# Altium PCB op-pcb-mcp23017-pcb.PcbDoc
Units mil, origin at the board's own origin, x right, y up, seen from the top; angles counter-clockwise.
Board outline 1730 x 2925 mil, 2 copper layers (Top Layer, Bottom Layer); 4 components, 16 nets, 48 pads, 0 vias.
Unrouted connection lines stored in the file: 20.
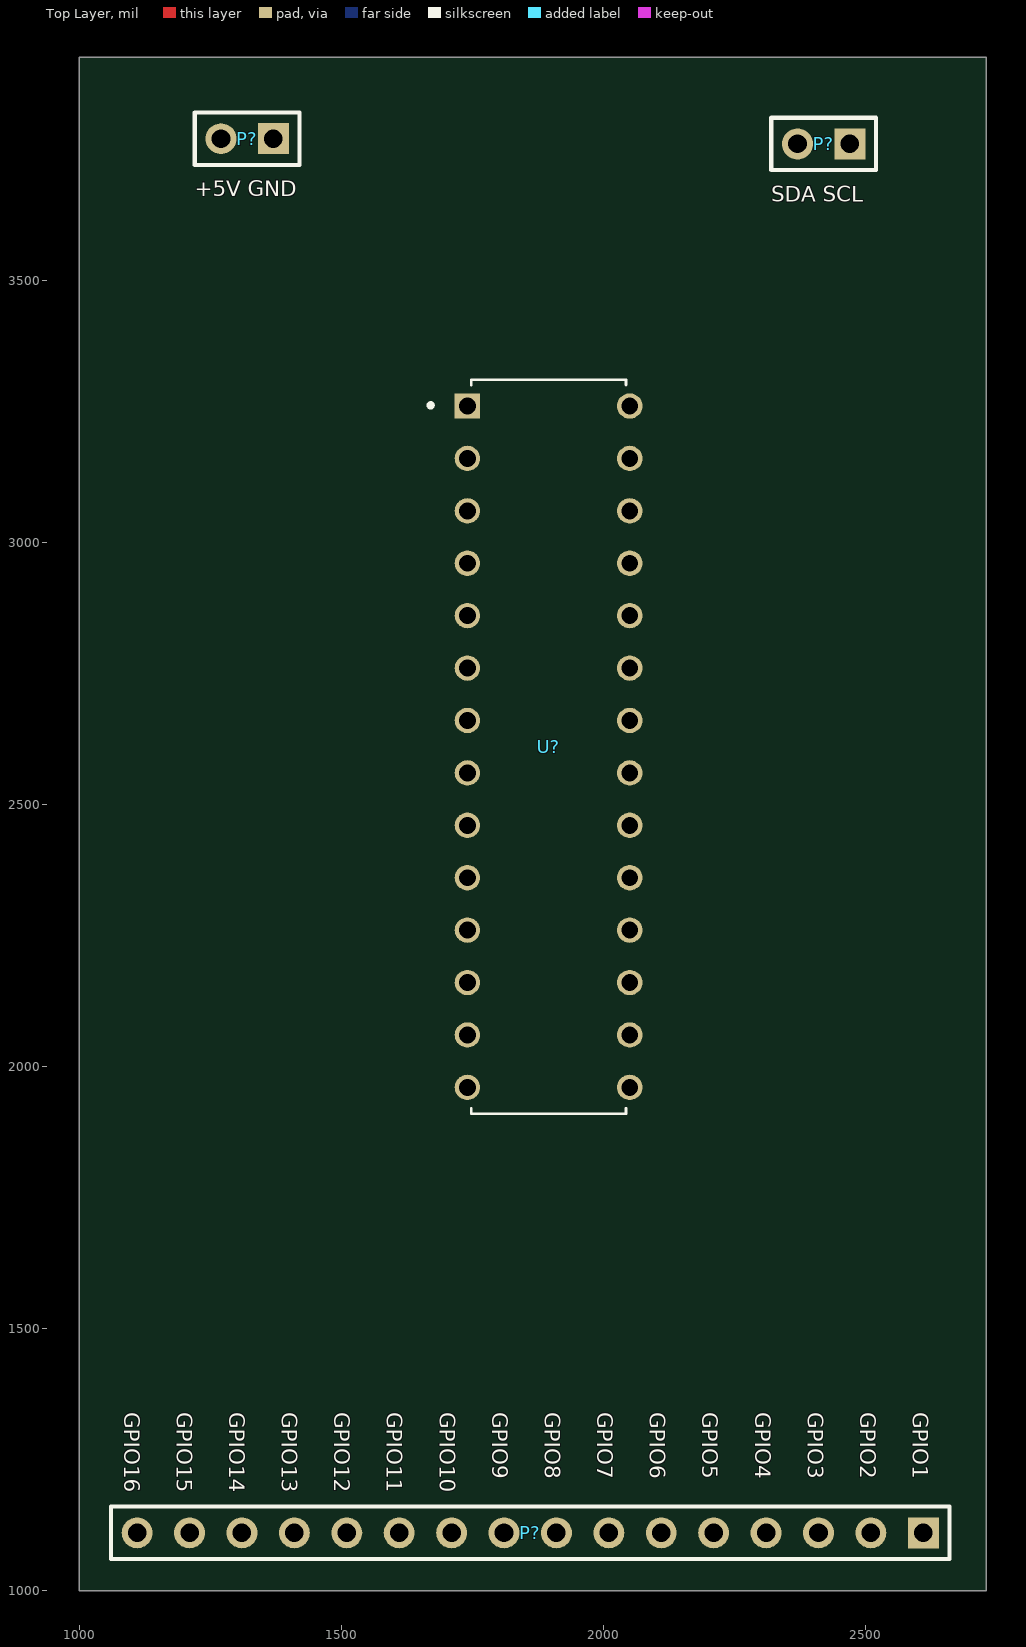
[diagram p0: Top Layer view]
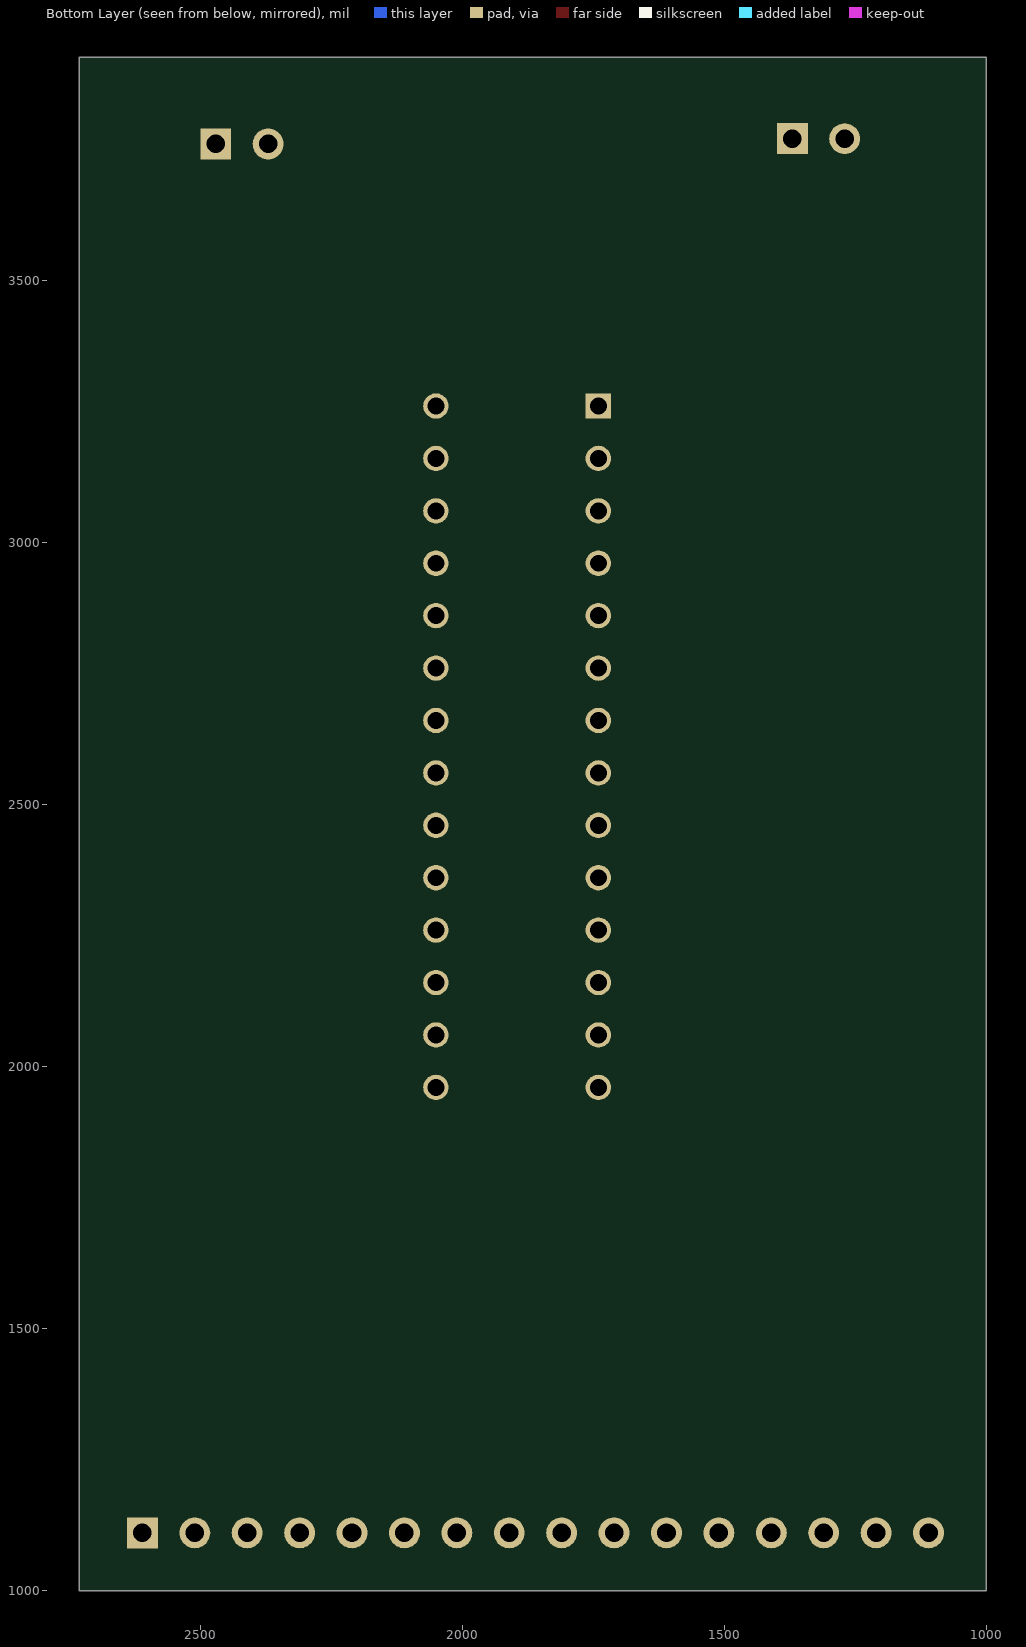
[diagram p1: Bottom Layer view, seen from below]

## Layer stack, top to bottom
Top Solder: solder mask 0.4, Solder Resist, Dk 3.5
Top Layer: signal copper 1.4
Dielectric 1: dielectric 12.6, FR-4, Dk 4.8
Bottom Layer: signal copper 1.4
Bottom Solder: solder mask 0.4, Solder Resist, Dk 3.5

## Board outline
1000,1000 2730,1000 2730,3925 1000,3925

## Design rules (kind name [scope] priority, off if disabled: settings)
Clearance [All] p1: gap=10 ignorepadtopadclearanceinfootprint=FALSE except(0: Arc-Hole Track-Hole SMDPad-Hole THPad-Hole Via-Hole Fill-Hole Poly-Hole Region-Hole Text-Hole)
PolygonConnect [All] p1: connectstyle=Relief reliefconductorwidth=10 reliefentries=4 polygonreliefangle="90 Angle" airgapwidth=10
RoutingVias [All] p1: holewidth=28 width=50 viastyle="Through Hole" minholewidth=28 minwidth=50 maxholewidth=28 maxwidth=50
SolderMaskExpansion [All] p1: expansion=4 istentingtop=FALSE
Width [All] p1: maxlimit=10 minlimit=10 preferedwidth=10
30 further rules are at their usual default settings.

## Classes and differential pairs
component class op-pcb-mcp23017-sch: P? U?

## Components (designator, comment, footprint, x,y, rotation, side; value= is the part's Value field where it differs from the comment)
P? "Header 2" HDR1X2 1370,3770 r180 top
P? "Header 2" HDR1X2 2470,3760 r180 top
P? "Header 16" HDR1X16 2610,1110 r180 top
U? "MCP23017" MCP23017 1895,2610 r0 top

## Footprints (in the part's own frame and the unit in brackets; to place one, negate y for a bottom-side part, rotate by r counter-clockwise, add the part's x,y. Pads: shape width x height; smd on the part's side, far side on the other; paste and mask are expansions set on the pad)
HDR1X2 [mm] "Connector; Header; 2 Position"
  rect 1.5x1.5 hole 0.9: 1(0,0)
  round 1.5 hole 0.9: 2(2.54,0)
  silkscreen extent -1.27,-1.27 3.81,1.27
HDR1X16 [mm] "Connector; Header; 16 Position"
  rect 1.5x1.5 hole 0.9: 1(0,0)
  round 1.5 hole 0.9: 2(2.54,0) 3(5.08,0) 4(7.62,0) 5(10.16,0) 6(12.7,0) 7(15.24,0) 8(17.78,0) 9(20.32,0) 10(22.86,0) 11(25.4,0) 12(27.94,0) 13(30.48,0) 14(33.02,0) 15(35.56,0) 16(38.1,0)
  silkscreen extent -1.27,-1.27 39.37,1.27
MCP23017 [mm]
  rect 1.23x1.23 / inner round 1.23 / far side rect 1.23x1.23 hole 0.82: 1(-3.935,16.51)
  round 1.23 hole 0.82: 2(-3.935,13.97) 3(-3.935,11.43) 4(-3.935,8.89) 5(-3.935,6.35) 6(-3.935,3.81) 7(-3.935,1.27) 8(-3.935,-1.27) 9(-3.935,-3.81) 10(-3.935,-6.35) 11(-3.935,-8.89) 12(-3.935,-11.43) 13(-3.935,-13.97) 14(-3.935,-16.51) 15(3.935,-16.51) 16(3.935,-13.97) 17(3.935,-11.43) 18(3.935,-8.89) 19(3.935,-6.35) 20(3.935,-3.81) 21(3.935,-1.27) 22(3.935,1.27) 23(3.935,3.81) 24(3.935,6.35) 25(3.935,8.89) 26(3.935,11.43) 27(3.935,13.97) 28(3.935,16.51)
  silkscreen extent -5.81,-17.78 3.75,17.78, body extent -4.06,-17.34 4.06,17.34, height 5.08

## Part data
P? P?: "Header, 2-Pin", LatestRevisionDate=17-Jul-2002, LatestRevisionNote="Re-released for DXP Platform.", Publisher="Altium Limited"
P?: "Header, 16-Pin", LatestRevisionDate=17-Jul-2002, LatestRevisionNote="Re-released for DXP Platform.", Publisher="Altium Limited"

## Nets (pads, with @x,y where several pads share a name; then routed paths per layer and width w, separated by ;. In a path a pad name is that pad's centre, name@x,y a point inside that pad or via, vN(x,y) a via of type N, cw(c..) or ccw(c..) an arc to the next point about the centre after c; other vN are vias at no path point)
NetP?_1: P?.1@2610,1110 U?.21
NetP?_2: P?.2@2370,3760 U?.9 U?.15 U?.16 U?.17 U?.18
NetP?_3: P?.3 U?.23
NetP?_4: P?.4 U?.24
NetP?_5: P?.5 U?.25
NetP?_6: P?.6 U?.26
NetP?_7: P?.7 U?.27
NetP?_8: P?.8 U?.28
NetP?_9: P?.9 U?.1
NetP?_10: P?.10 U?.2
NetP?_11: P?.11 U?.3
NetP?_12: P?.12 U?.4
NetP?_13: P?.13 U?.5
NetP?_14: P?.14 U?.6
NetP?_15: P?.15 U?.7
NetP?_16: P?.16 U?.8
pads on no net: P?.1@1370,3770 P?.1@2470,3760 P?.2@1270,3770 P?.2@2510,1110 U?.10 U?.11 U?.12 U?.13 U?.14 U?.19 U?.20 U?.22

## Silkscreen, mask and mechanical layers (free items; w line width, h text height)
Top Overlay:
  text "+5V GND" at 1220,3660 h30
  text "SDA SCL" at 2320,3650 h30
  text "GPIO16" at 1085,1340 h30 r270
  text "GPIO15" at 1185.33,1340 h30 r270
  text "GPIO14" at 1285.67,1340 h30 r270
  text "GPIO13" at 1386,1340 h30 r270
  text "GPIO12" at 1486.33,1340 h30 r270
  text "GPIO11" at 1586.67,1340 h30 r270
  text "GPIO10" at 1687,1340 h30 r270
  text "GPIO9" at 1787.33,1340 h30 r270
  text "GPIO8" at 1887.67,1340 h30 r270
  text "GPIO7" at 1988,1340 h30 r270
  text "GPIO6" at 2088.33,1340 h30 r270
  text "GPIO5" at 2188.67,1340 h30 r270
  text "GPIO4" at 2289,1340 h30 r270
  text "GPIO3" at 2389.33,1340 h30 r270
  text "GPIO2" at 2489.67,1340 h30 r270
  text "GPIO1" at 2590,1340 h30 r270